# Altium PCB Copy of Demo_PCB.PcbDoc
Units mm, origin at the board's own origin, x right, y up, seen from the top; angles counter-clockwise.
Board outline 50 x 35 mm, 4 copper layers (Top Layer, Internal1, Internal2, Bottom Layer), stack 1.615 mm thick; 66 components, 59 nets, 275 pads, 0 vias.
Unrouted connection lines stored in the file: 185.
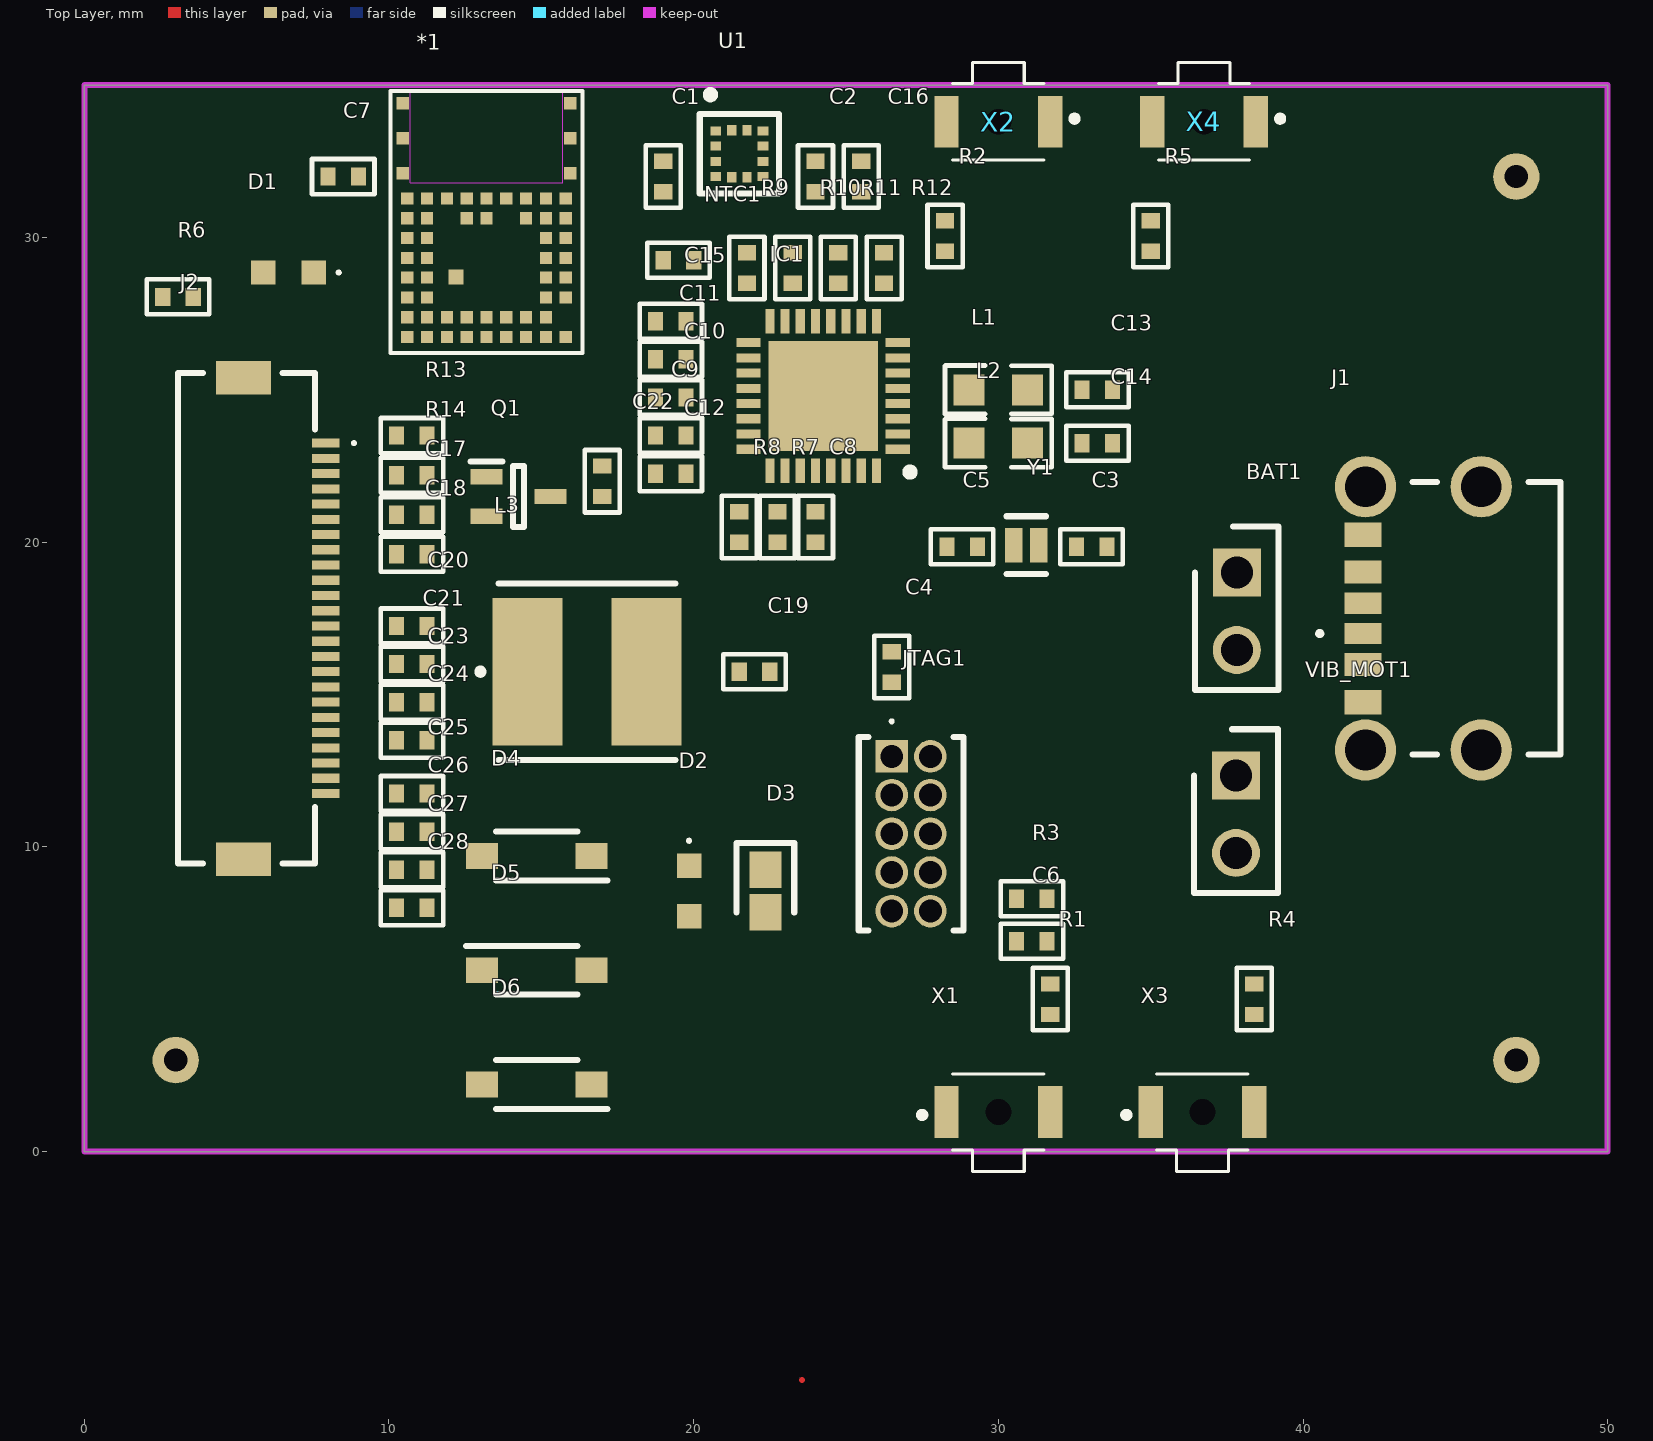
[diagram p0: Top Layer view]
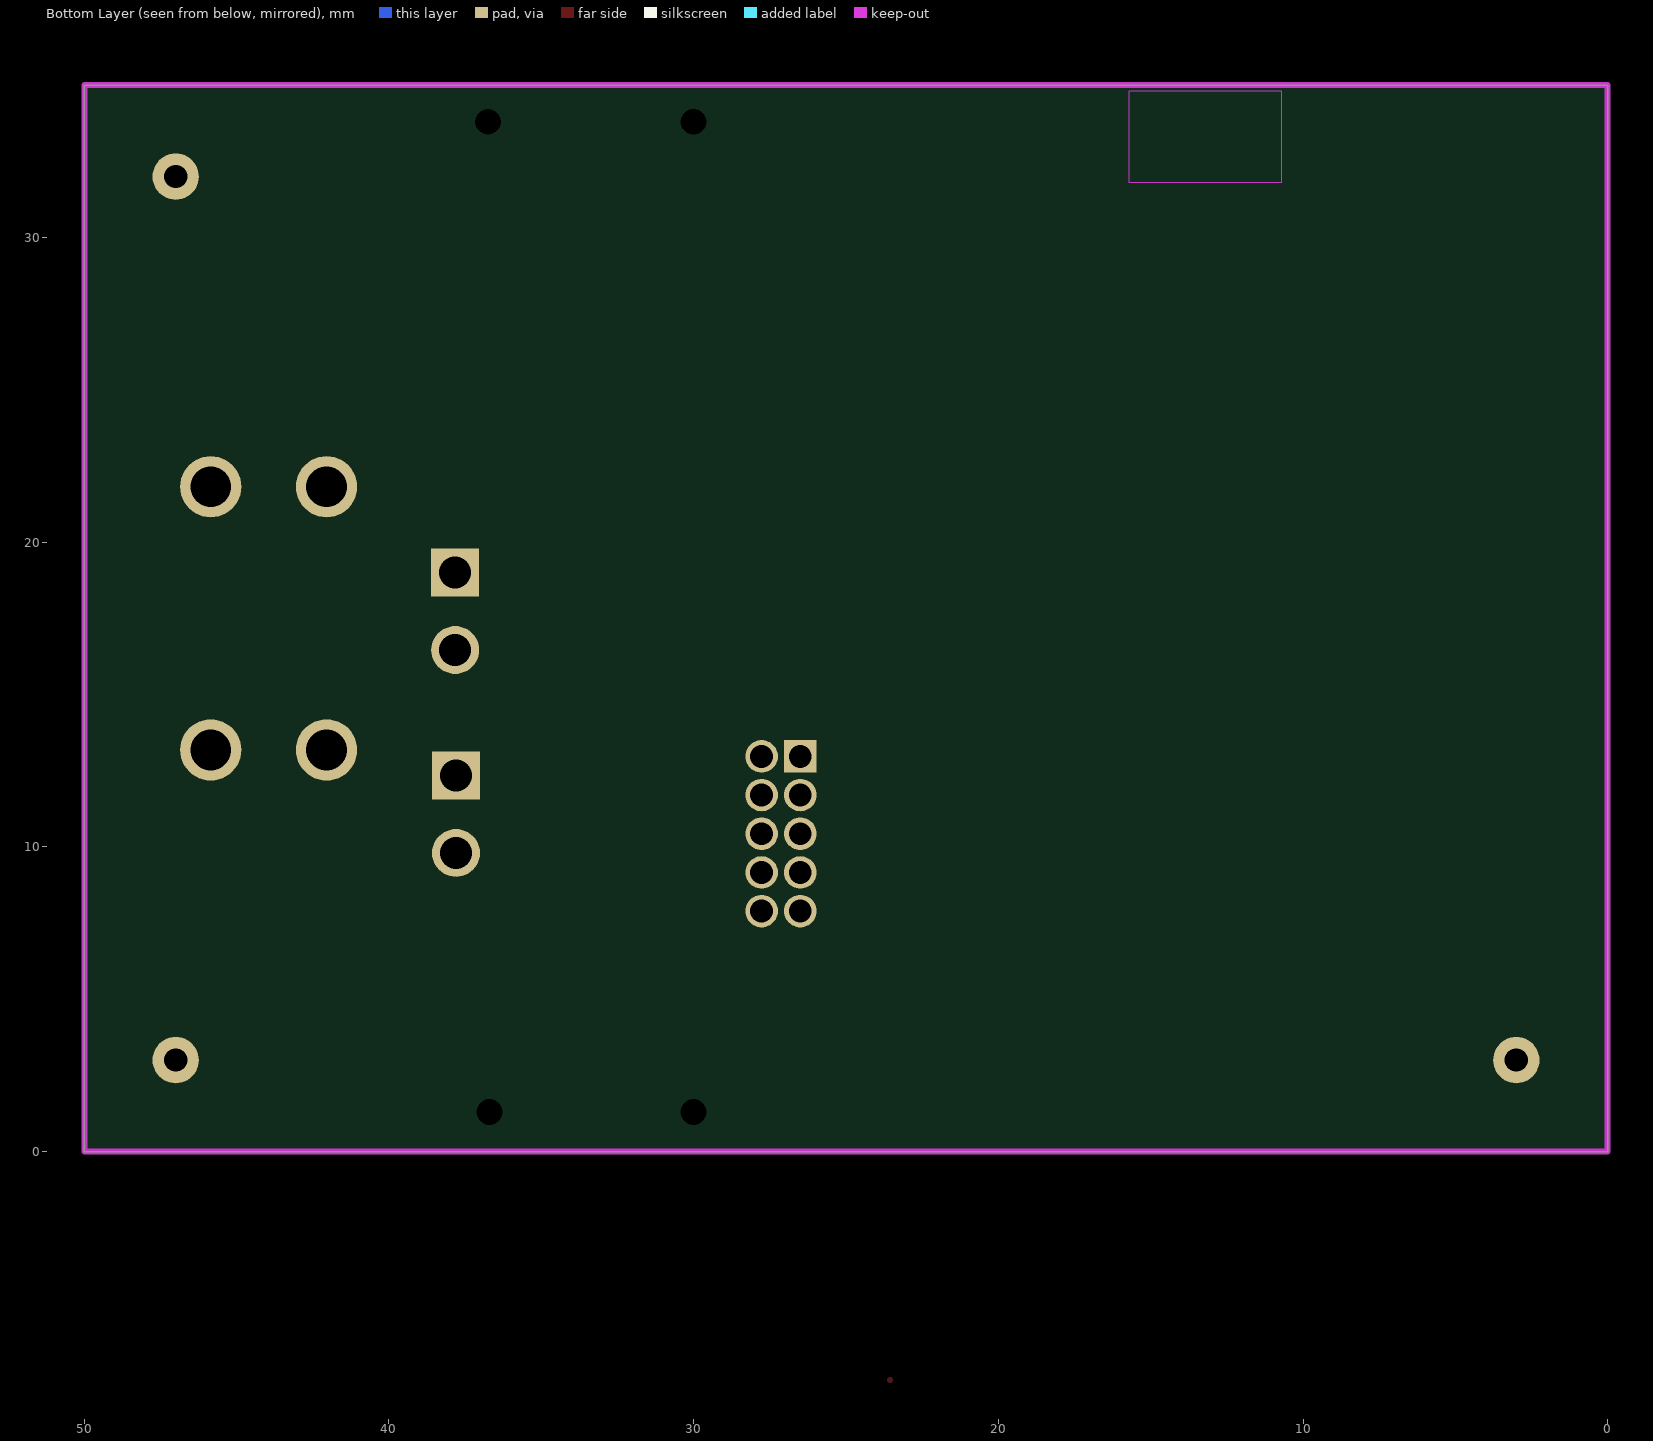
[diagram p1: Bottom Layer view, seen from below]

## Layer stack, top to bottom
Top Solder: solder mask 0.0102, Solder Resist, Dk 3.5
Top Layer: signal copper 0.0175
Prepeg_Top1: prepreg 0.2, Dk 4.5
Prepeg_Top2: prepreg 0.2, Dk 4.5
Internal1: signal copper 0.035
Core Dielectric: core 0.71, FR4, Dk 4.8
Internal2: signal copper 0.035
Prepeg_Bottom1: prepreg 0.2, Dk 4.5
Prepeg_Bottom2: prepreg 0.2, Dk 4.5
Bottom Layer: signal copper 0.0175
Bottom Solder: solder mask 0.0102, Solder Resist, Dk 3.5

## Board outline
0,35 50,35 50,0 0,0

## Design rules (kind name [scope] priority, off if disabled: settings)
BoardOutlineClearance [All] p1: gap=0.3 ignorepadtopadclearanceinfootprint=FALSE
Clearance Default [All] p1: gap=0.2 ignorepadtopadclearanceinfootprint=FALSE
Clearance [All] p2: gap=0.12 ignorepadtopadclearanceinfootprint=FALSE except(0: Arc-Hole Track-Hole SMDPad-Hole THPad-Hole Via-Hole Fill-Hole Poly-Hole Region-Hole Text-Hole; 0.25: Track-Via Track-Fill Track-Poly Track-Region Track-Text)
HoleSize [All] p1: absolutevalues=TRUE maxlimit=6 minlimit=0.3 maxpercent=80.000 minpercent=20.000
HoleToHoleClearance [All] p1: gap=0.52 allowstackedmicrovias=TRUE
MinimumAnnularRing [All] p1: minimumring=0.15
MinimumSolderMaskSliver [All] p1: minsoldermaskwidth=0.1
PlaneClearance [All] p1: clearance=0.25
PlaneConnect [All] p1: planeconnectstyle=Relief reliefexpansion=0.2 reliefentries=4 reliefconductorwidth=0.25 reliefairgap=0.2
PolygonConnect PowerCircuits [InNet('No Net')] p1: connectstyle=Relief reliefconductorwidth=0.4 reliefentries=4 polygonreliefangle="90 Angle" airgapwidth=0.254
PolygonConnect [All] p2: thpad.connectstyle=Relief thpad.reliefconductorwidth=0.2 thpad.reliefentries=4 thpad.polygonreliefangle="90 Angle" thpad.airgapwidth=0.2 smdpad.connectstyle=Relief smdpad.reliefconductorwidth=0.2 smdpad.reliefentries=4 smdpad.polygonreliefangle="90 Angle" smdpad.airgapwidth=0.2 via.connectstyle=Direct via.reliefconductorwidth=0.2 via.reliefentries=4 via.polygonreliefangle="45 Angle" via.airgapwidth=0.2
RoutingVias [All] p1: holewidth=0.35 width=0.75 viastyle="Through Hole" minholewidth=0.3 minwidth=0.7 maxholewidth=0.5 maxwidth=0.9
SilkToSilkClearance [All] p1: silktosilkclearance=0.12
SilkToSolderMaskClearance [IsPad] p1: minsilkscreentomaskgap=0.06 clearancetoexposedcopper=TRUE
SolderMaskExpansion [All] p1: expansion=0.05 istentingtop=FALSE
UnRoutedNet [All] p1: checkbadconnections=TRUE
Width [All] p1: maxlimit=1.5 minlimit=0.12 preferedwidth=0.2 midlayer1_prefwidth=0.15 midlayer2_prefwidth=0.15 minimp=50.000000 maximp=50.000000 favimp=50.000000
22 further rules are at their usual default settings.

## Classes and differential pairs
component class zasilanie: BAT1 C8 C9 C10 C11 C12 C13 C14 C15 C16 D2 D3 IC1 J1 L1 L2 NTC1 R7 R8 R9 R10 R11 R12 VIB_MOT1
component class BL653: *1 C3 C4 C5 C6 C7 D1 JTAG1 R1 R2 R3 R4 R5 R6 X1 X2 X3 X4 Y1
component class accelerometer: C1 C2 U1
component class 1.54inch_e-Paper: C17 C18 C19 C20 C21 C22 C23 C24 C25 C26 C27 C28 D4 D5 D6 J2 L3 L? Q1 R13 R14

## Components (designator, comment, footprint, x,y, rotation, side; value= is the part's Value field where it differs from the comment)
*1 "BL653u" ? 13.2,29.3 r90 top
BAT1 "Battery" RHDR20W60P0X254_1X20_5130X250X888P 37.7,19 r270 top
C1 "100n" 0402_CAP_REFLOW 19,32 r270 top
C2 "100n" 0402_CAP_REFLOW 24,32 r270 top
C3 "18p" 0402_CAP_REFLOW 33.063,19.85 r180 top
C4 "100nF" 0402_CAP_REFLOW 26.5,15.9 r90 top
C5 "18p" 0402_CAP_REFLOW 28.813,19.85 r0 top
C6 "100uF" 0402_CAP_REFLOW 31.1,6.9 r0 top
C7 "100nF" 0402_CAP_REFLOW 8.5,32 r180 top
C8 "10u" 0402_CAP_REFLOW 24,20.5 r90 top
C9 "10u" 0402_CAP_REFLOW 19.25,23.5 r180 top
C10 "10u" 0402_CAP_REFLOW 19.25,24.75 r180 top
C11 "10u" 0402_CAP_REFLOW 19.25,26 r180 top
C12 "1u" 0402_CAP_REFLOW 19.25,22.25 r180 top
C13 "10u" 0402_CAP_REFLOW 33.25,25 r0 top
C14 "10u" 0402_CAP_REFLOW 33.25,23.25 r0 top
C15 "2.2u" 0402_CAP_REFLOW 19.25,27.25 r180 top
C16 "100n" 0402_CAP_REFLOW 25.5,32 r270 top
C17 "54nF" 0402_CAP_REFLOW 10.75,20.9 r0 top
C18 "54nF" 0402_CAP_REFLOW 10.75,19.6 r0 top
C19 "250nF" 0402_CAP_REFLOW 22,15.75 r0 top
C20 "100nF" 0402_CAP_REFLOW 10.75,17.25 r0 top
C21 "54nF" 0402_CAP_REFLOW 10.75,16 r0 top
C22 "250nF" 0402_CAP_REFLOW 17,22 r90 top
C23 "54nF" 0402_CAP_REFLOW 10.75,14.75 r180 top
C24 "54nF" 0402_CAP_REFLOW 10.75,13.5 r0 top
C25 "54nF" 0402_CAP_REFLOW 10.75,11.75 r0 top
C26 "54nF" 0402_CAP_REFLOW 10.75,10.5 r0 top
C27 "54nF" 0402_CAP_REFLOW 10.75,9.25 r0 top
C28 "54nF" 0402_CAP_REFLOW 10.75,8 r0 top
D1 "=Value" LED_G 6.7,28.85 r180 top
D2 "=Value" LED_G 19.85,8.55 r270 top
D3 "=Value" LED_B 22.35,8.55 r270 top
D4 "Diode MBR0530" SOD3716X135N 14.85,9.7 r180 top
D5 "Diode MBR0530" SOD3716X135N 14.85,5.95 r0 top
D6 "Diode MBR0530" SOD3716X135N 14.85,2.2 r180 top
IC1 "NPM1300-QEAA-R" nPM1300-QFN50P500X500X90-33N 24.25,24.8 r180 top
J1 "USB-C" USB-C 45,17.5 r90 top
J2 "F34G-1A7Q1-E8C24" F34G1A7Q1E8C24 5.5,17.5 r270 top
JTAG1 "20021111-00010T1LF" 2002111100010T1LF 26.5,12.97 r270 top
L1 "2.2u" 0603_IND_2.2u_30%_DCR<400m? 30,25 r0 top
L2 "2.2u" 0603_IND_2.2u_30%_DCR<400m? 30,23.25 r0 top
L3 "68uH" SRR5828A2R6Y 16.5,15.75 r90 top
NTC1 "Header 2" 0402_RES_REFLOW 19.5,29.25 r0 top
Q1 "Si1308EDL-T1-GE3" SOT65P210X110-3N 14.25,21.5 r0 top
R1 "10K" 0402_RES_REFLOW 31.7,5 r90 top
R2 "10K" 0402_RES_REFLOW 28.25,30.05 r270 top
R3 "47K" 0402_RES_REFLOW 31.1,8.3 r180 top
R4 "10K" 0402_RES_REFLOW 38.4,5 r90 top
R5 "10K" 0402_RES_REFLOW 35,30.05 r270 top
R6 "1.69k" 0402_RES_REFLOW 3.075,28.05 r0 top
R7 "1.69k" 0402_RES_REFLOW 22.75,20.5 r90 top
R8 "1.69k" 0402_RES_REFLOW 21.5,20.5 r90 top
R9 "300k" 0402_RES_REFLOW 21.75,29 r270 top
R10 "300k" 0402_RES_REFLOW 23.25,29 r270 top
R11 "10K" 0402_RES_REFLOW 24.75,29 r90 top
R12 "10K" 0402_RES_REFLOW 26.25,29 r90 top
R13 "10K" 0402_RES_REFLOW 10.75,23.5 r180 top
R14 "3" 0402_RES_REFLOW 10.75,22.2 r0 top
U1 "BMA456" FP-BMA456-MFG 21.5,32.75 r270 top
VIB_MOT1 "vibration_motor_ODS-13807" RHDR20W60P0X254_1X20_5130X250X888P 37.673,12.34 r270 top
X1 "B3U-3000PM-B" B3U3000PMB 30,1.3 r180 top
X2 "B3U-3000PM-B" B3U3000PMB 30,33.8 r0 top
X3 "B3U-3000PM-B" B3U3000PMB 36.7,1.3 r180 top
X4 "B3U-3000PM-B" B3U3000PMB 36.75,33.8 r0 top
Y1 "ECS-.327-12.5-1210-TR" FP-ECX-1210-MFG 30.913,19.9 r0 top

## Footprints (in the part's own frame and the unit in brackets; to place one, negate y for a bottom-side part, rotate by r counter-clockwise, add the part's x,y. Pads: shape width x height; smd on the part's side, far side on the other; paste and mask are expansions set on the pad)
0402_CAP_REFLOW [mm]
  rect 0.5x0.6 smd paste-0.03 mask+0.1: 1(0.5,0) 2(-0.5,0)
  silkscreen extent -1.02,-0.57 1.02,0.57, body extent -0.5,-0.25 0.5,0.25, height 0.5
0402_RES_REFLOW [mm]
  rect 0.5x0.6 smd paste-0.03 mask+0.1: 1(0.5,0) 2(-0.5,0)
  silkscreen extent -1.02,-0.57 1.02,0.57, body extent -0.5,-0.25 0.5,0.25, height 0.3
0603_IND_2.2u_30%_DCR<400m? [mil]
  rect 40x40 smd: 1(-37.89,0) 2(37.89,0)
  silkscreen extent -69,-31 69,31, body extent -31,-16 31,16, height 39
2002111100010T1LF [mm]
  rect 1.07x1.07 hole 0.75: 1(0,0)
  round 1.07 hole 0.75: 2(0,1.27) 3(1.27,0) 4(1.27,1.27) 5(2.54,0) 6(2.54,1.27) 7(3.81,0) 8(3.81,1.27) 9(5.08,0) 10(5.08,1.27)
  silkscreen extent -1.2,-1.08 5.71,2.35
B3U3000PMB [mm]
  rect 0.8x1.7 smd: 1(1.7,0) 2(-1.7,0)
  round 0.425 hole 0.85 unplated: 3(0,0)
  silkscreen extent -1.5,-1.25 2.6,1.95
F34G1A7Q1E8C24 [mm]
  rect 0.3x0.9 smd: 1(-5.75,2.425) 2(-5.25,2.425) 3(-4.75,2.425) 4(-4.25,2.425) 5(-3.75,2.425) 6(-3.25,2.425) 7(-2.75,2.425) 8(-2.25,2.425) 9(-1.75,2.425) 10(-1.25,2.425) 11(-0.75,2.425) 12(-0.25,2.425) 13(0.25,2.425) 14(0.75,2.425) 15(1.25,2.425) 16(1.75,2.425) 17(2.25,2.425) 18(2.75,2.425) 19(3.25,2.425) 20(3.75,2.425) 21(4.25,2.425) 22(4.75,2.425) 23(5.25,2.425) 24(5.75,2.425)
  rect 1.1x1.8 smd: MP1(-7.9,-0.275) MP2(7.9,-0.275)
  silkscreen extent -8.05,-2.42 8.05,3.4
FP-BMA456-MFG [mm]
  rect 0.3x0.35 smd paste+0 mask+0: 1(-0.75,-0.775) 2(-0.25,-0.775) 3(0.25,-0.775) 4(0.75,-0.775) 7(0.75,0.775) 8(0.25,0.775) 9(-0.25,0.775) 10(-0.75,0.775)
  rect 0.35x0.3 smd paste+0 mask+0: 5(0.775,-0.25) 6(0.775,0.25) 11(-0.775,0.25) 12(-0.775,-0.25)
  silkscreen extent -2.06,-1.3 1.3,1.3, body extent -1,-1 1,1, height 0.7
FP-ECX-1210-MFG [mm]
  rect 0.575x1.14 smd paste+0 mask+0: 1(-0.413,0) 2(0.413,0)
  silkscreen extent -0.65,-0.95 0.65,0.95, body extent -0.6,-0.5 0.6,0.5, height 0.5
LED_B [mm] "SML-LX0603USBW-TR"
  rect 1.2x1.05 smd: 1(-0.7,0) 2(0.7,0)
  silkscreen extent -1.58,-0.95 0.7,0.95
LED_G [mm] "SML-LXFM0603SUGCTR"
  rect 0.8x0.8 smd: 1(-0.825,0) 2(0.825,0)
  silkscreen extent -1.7,-0.05 -1.6,0.05, body extent -0.8,-0.4 0.8,0.4, height 1.2
nPM1300-QFN50P500X500X90-33N [mm]
  rect 0.8x0.3 smd: 1(-2.45,1.75) 2(-2.45,1.25) 3(-2.45,0.75) 4(-2.45,0.25) 5(-2.45,-0.25) 6(-2.45,-0.75) 7(-2.45,-1.25) 8(-2.45,-1.75) 17(2.45,-1.75) 18(2.45,-1.25) 19(2.45,-0.75) 20(2.45,-0.25) 21(2.45,0.25) 22(2.45,0.75) 23(2.45,1.25) 24(2.45,1.75)
  rect 0.3x0.8 smd: 9(-1.75,-2.45) 10(-1.25,-2.45) 11(-0.75,-2.45) 12(-0.25,-2.45) 13(0.25,-2.45) 14(0.75,-2.45) 15(1.25,-2.45) 16(1.75,-2.45) 25(1.75,2.45) 26(1.25,2.45) 27(0.75,2.45) 28(0.25,2.45) 29(-0.25,2.45) 30(-0.75,2.45) 31(-1.25,2.45) 32(-1.75,2.45)
  rect 3.6x3.6 smd: 33(0,0)
  silkscreen extent -2.98,2.38 -2.73,2.62, body extent -2.55,-2.55 2.55,2.55, height 0.9
RHDR20W60P0X254_1X20_5130X250X888P [mm]
  rect 1.575x1.575 hole 1.05: 1(0,0.127)
  round 1.575 hole 1.05: 2(2.54,0.127)
  silkscreen extent -1.52,-1.25 3.85,1.5
SOD3716X135N [mm]
  rect 1.05x0.85 smd: 1(-1.8,0) 2(1.8,0)
  silkscreen extent -2.32,-0.8 1.34,0.8
SOT65P210X110-3N [mm]
  rect 1.05x0.5 smd: 1(-1.05,0.65) 2(-1.05,-0.65) 3(1.05,0)
  silkscreen extent -1.58,-1 0.18,1.15
SRR5828A2R6Y [mm]
  rect 4.85x2.3 smd: 1(0,1.95) 2(0,-1.95)
  silkscreen extent -2.9,-2.9 2.9,3.6
USB-C [mm]
  rect 0.7x1.2 smd: A5(-0.5,3.03) B5(0.5,3.03)
  rect 0.76x1.2 smd: A9(1.52,3.03) B9(-1.52,3.03)
  rect 0.8x1.2 smd: A12(2.75,3.03) B12(-2.75,3.03)
  round 2.01 hole 1.34: MH1(-4.32,-0.85) MH2(4.32,-0.85) MH3(-4.32,2.95) MH4(4.32,2.95)
  silkscreen extent -4.47,-3.45 4.47,4.5, body extent -4.47,-3.44 4.47,3.46, height 0.25
? [mm]
  rect 0.4x0.4 smd mask+0.051: 1(1.982,2.6) 2(1.982,1.95) 3(1.982,1.3) 4(1.982,0.65) 5(1.982,0) 6(1.982,-0.65) 7(1.982,-1.3) 8(1.982,-1.95) 9(1.982,-2.6) 10(1.332,-2.6) 11(0.683,-2.6) 12(0.033,-2.6) 13(-0.617,-2.6) 14(-1.267,-2.6) 16(-2.567,-2.6) 17(-2.567,-1.95) 18(-2.567,-1.3) 19(-2.567,-0.65) 20(-2.567,0) 21(-2.567,0.65) 22(-2.567,1.3) 23(-2.567,1.95) 24(-2.567,2.6) 25(-1.917,2.6) 26(-1.267,2.6) 27(-0.617,2.6) 28(0.033,2.6) 29(0.682,2.6) 30(1.333,2.6) 31(1.332,1.95) 33(1.332,0.65) 34(1.332,0) 36(1.332,-1.3) 37(1.333,-1.95) 38(0.682,-1.95) 39(0.033,-1.95) 40(-0.617,-1.95) 41(-1.267,-1.95) 42(-1.917,-1.95) 43(-1.917,-1.3) 44(-1.917,-0.65) 45(-1.917,0) 46(-1.917,0.65) 47(-1.917,1.3) 48(-1.917,1.95) 49(-1.267,1.95) 50(-0.617,1.95) 51(0.033,1.95) 52(0.683,1.95) G2(5.107,-2.75) G3(3.957,-2.75) G4(2.807,-2.75) G5(2.808,2.75) G6(3.957,2.75) G7(5.107,2.75)
  rect 0.5x0.5 smd mask+0.051: G1(-0.592,1)
  Keep-Out Layer lines w0.025: 2.5,2.5 5.508,2.5 5.508,-2.5 2.5,-2.5 2.5,2.5
  silkscreen extent -3.09,-3.15 5.51,3.15, body extent -2.77,-2.95 5.31,2.95, height 0.01

## Part data
BAT1: "BATTERY, Li-ion, Li-polymer, or LiFePO4", LatestRevisionDate=17-Jul-2002, LatestRevisionNote="Re-released for DXP Platform.", Publisher="Altium Limited"
C1 C2: library part CAP_100n, "Ceramic capacitor"
C3 C5: library part CAP_18p, "Ceramic capacitor"
C4 C7 C20: library part "Capacitor 100nF"
C6: library part "Capacitor 100uF"
C8 C9 C10 C11 C13 C14: library part Cap_0402_10u, "Ceramic capacitor"
C12: library part Cap_0402_1u, "Ceramic capacitor"
C15: library part Cap_0402_2.2u, "Ceramic capacitor"
C16: library part Cap_0402_100n, "Ceramic capacitor"
C17 C18 C21 C23 C24 C25 C26 C27 C28: library part "Capacitor 54nF"
C19 C22: library part "Capacitor 250nF"
D1 D2: library part LED_G
D3: library part LED_B
IC1: "Integrated Circuit", Manufacturer_Name="Nordic Semiconductor", Mouser Part Number=949-NPM1300-QEAA-R, Datasheet Link=https://infocenter.nordicsemi.com/index.jsp?topic=%2Fstruct_pmic%2Fstruct%2Fnpm1300.html, Height=0.9mm, Manufacturer_Part_Number=NPM1300-QEAA-R, Mouser Price/Stock=https://www.mouser.co.uk/ProductDetail/Nordic-Semiconductor/nPM1300-QEAA-R?qs=3pZoU%2F6IRTiFavqFmjPoaw%3D%3D
J1: "Connector", Manufacturer_Name=Molex, Manufacturer_Part_Number=217175-0001, Mouser Part Number=538-217175-0001, Datasheet Link=https://www.molex.com/pdm_docs/sd/2171750001_sd.pdf, Height=3.46mm, Mouser Price/Stock=https://www.mouser.co.uk/ProductDetail/Molex/217175-0001?qs=DRkmTr78QARWJMiqNnldSg%3D%3D
J2: library part "FFC & FPC Connectors"
JTAG1: "Minitek127<sup></sup>,  Board to Board connector, Unshrouded Vertical Header, Through Hole, Double Row, 10 Positions, 1.27mm (0.050in) pitch.", Manufacturer_Name="Amphenol Communications Solutions", Datasheet Link=https://cdn.amphenol-cs.com/media/wysiwyg/files/drawing/20021111.pdf, Geometry.Height=5.75mm, Manufacturer_Part_Number=20021111-00010T1LF
L1 L2: library part L_0603_2.2u_30%_DCR<400mΩ, "Inductor"
L3: library part InductorA_A, "SRR5828A-680M"
NTC1: library part NTC_1%, "NTC, 10 / 47 / 100 k", LatestRevisionDate=17-Jul-2002, LatestRevisionNote="Re-released for DXP Platform.", Publisher="Altium Limited"
Q1: "MOSFET N-Ch 30V 1.5A TrenchFET SC70 Vishay Si1308EDL-T1-GE3 N-channel MOSFET Transistor, 1.5 A, 30 V, 3-Pin SC-70", Manufacturer_Name=Vishay, Mouser Part Number=78-SI1308EDL-T1-GE3, Datasheet Link=https://componentsearchengine.com/Datasheets/1/SI1308EDL-T1-GE3.pdf, Geometry.Height=1.1mm, Manufacturer_Part_Number=Si1308EDL-T1-GE3, Mouser Price/Stock=https://www.mouser.co.uk/ProductDetail/Vishay-Semiconductors/SI1308EDL-T1-GE3?qs=bX1%252BNvsK%2FBramh9tgpOaEw%3D%3D
R1 R2 R4 R5 R11 R12 R13: library part "Resistor R10K"
R3: library part "Resistor R47K"
R6 R7: library part RES_0402_1.69k_1, "Resistor, green LED"
R8: library part RES_0402_1.69k, "Resistor, blue LED"
R9 R10: library part RES_0402_300k_0.05W_1%, "Resistor"
R14: library part "Resistor R3"
U1: library part CMP-191065-000002-1, "ACCEL 2-16G I2C/SPI 12LGA", Ambient Temperature Range High=+85°C, Ambient Temperature Range Low=-40°C, Frequency=1.6kHz, Manufacturer="Bosch Sensortec", Max Supply Voltage=3.6V, Min Supply Voltage=1.2V, Operating Supply Current=150uA, Package=0, Temperature="-40°C to +85°C", Accel Axis="X+Y and Z", Accel Range=2/4/8/16g, Accel Sensitivity=2048-16384LSB/g, Automotive=No, Category=IC, ComponentLink2Description=Datasheet, ComponentLink2URL=https://ae-bst.resource.bosch.com/media/_tech/media/datasheets/BST-BMA456-DS000.pdf, Device Class L1=Sensors, Device Class L2="Motion Sensors", Device Class L3=Accelerometers, Digikey Description="ACCEL 2-16G I2C/SPI 12LGA", Height=0.7mm, Lead Free=Yes, Manufacturer Part Number=BMA456, Mouser Description="BMA456 Series 3.6 V 1.6 kHz Digital Triaxial Acceleration Sensor - LGA-12", Octopart=https://octopart.com/bma456-bosch+sensortec-99488369, RoHS=TRUE, Sensor Output=I2C,SPI, Temperature Range High=+85°C, Temperature Range Low=-40°C
X1 X2 X3 X4: "Tactile Switches Side Actuate w/Boss w/out Ground Term", Manufacturer_Name="Omron Electronics", Mouser Part Number=653-B3U-3000PM-B, Geometry.Height=1.35mm, Manufacturer_Part_Number=B3U-3000PM-B, Mouser Price/Stock=https://www.mouser.co.uk/ProductDetail/Omron-Electronics/B3U-3000PM-B?qs=hnUcNC2tU0qDz9eschRYDA%3D%3D
Y1: library part CMP-40224-000006-1, "CRYSTAL 32.7680KHZ 12.5PF SMD", Frequency=32.768kHz, Load Capacitance=12.5pF, Manufacturer="ECS International", Package=ECX-1210, Temperature="-40°C to +85°C", Temperature Range High=+85°C, Temperature Range Low=-40°C, Tolerance=20ppm, Automotive=No, Category=Crys, ComponentLink2Description=Datasheet, ComponentLink2URL=https://ecsxtal.com/store/pdf/ECX-1210.pdf, Device Class L1="Passive Components", Device Class L2="Crystals / Oscillators", Device Class L3=Crystals, Digikey Description="CRYSTAL 32.7680KHZ 12.5PF SMD", Esr=90kΩ, Height=0.5mm, Lead Free=Yes, Manufacturer Part Number=ECS-.327-12.5-1210-TR, Octopart=https://octopart.com/ecs-.327-12.5-1210-tr-ecs+international-81221340, RoHS=TRUE, Series=ECX-1210

## Free pads (board coordinates)
  round 1.524 hole 0.762: 1(47,32) 2(3,3) 3(47,3)

## Nets (pads, with @x,y where several pads share a name; then routed paths per layer and width w, separated by ;. In a path a pad name is that pad's centre, name@x,y a point inside that pad or via, vN(x,y) a via of type N, cw(c..) or ccw(c..) an arc to the next point about the centre after c; other vN are vias at no path point)
B1: *1.37 R1.2 X1.2
B2: *1.44 R2.2 X2.2
B3: *1.46 R4.2 X3.2
B4: *1.49 R5.2 X4.2
CC1: IC1.23 J1.A5
CC2: IC1.24 J1.B5
GND: *1.1 *1.3 *1.5 *1.7 *1.9 *1.11 *1.16 *1.18 *1.20 *1.24 *1.48 *1.G1 *1.G2 *1.G3 *1.G4 *1.G5 *1.G6 *1.G7 BAT1.2 C1.1 C2.2 C3.2 C4.1 C5.2 C6.1 C7.1 C8.2 C9.1 C10.1 C11.1 C12.1 C13.1 C14.1 C15.1 C16.1 C17.1 C18.1 C19.1 C20.1 C21.1 C23.2 C24.1 C25.1 C26.1 C27.1 C28.1 D6.2 IC1.2 IC1.6 IC1.33 J1.A12 J1.B12 J1.MH1 J1.MH2 J1.MH3 J1.MH4 J2.8 J2.17 J2.MP1 J2.MP2 JTAG1.3 JTAG1.9 NTC1.2 R1.1 R2.1 R4.1 R5.1 R6.2 R9.2 R10.2 R13.2 R14.1 U1.8 U1.9 VIB_MOT1.2
LED: *1.12 D1.1
Net*1_17: *1.17 U1.2
Net*1_27: *1.27 U1.6
Net*1_29: *1.29 U1.5
Net*1_34: *1.34 U1.10
Net*1_36: *1.36 J2.9
Net*1_38: *1.38 J2.10
Net*1_39: *1.39 J2.12
Net*1_40: *1.40 U1.12
Net*1_43: *1.43 U1.1
Net*1_45: *1.45 J2.14
Net*1_47: *1.47 J2.13
Net*1_50: *1.50 J2.11
NetBAT1_1: BAT1.1 C15.2 IC1.19
NetC17_2: C17.2 J2.4
NetC18_2: C18.2 J2.5
NetC21_2: C21.2 J2.18
NetC22_1: C22.1 D5.2 D6.1
NetC22_2: C22.2 D4.1 L3.1 Q1.3
NetC23_1: C23.1 J2.19
NetC24_2: C24.2 J2.20
NetC25_2: C25.2 D4.2 J2.21
NetC26_2: C26.2 J2.22
NetC27_2: C27.2 D5.1 J2.23
NetC28_2: C28.2 J2.24
NetD1_2: D1.2 R6.1
NetD2_2: D2.2 R7.2
NetD3_2: D3.2 R8.2
NetIC1_3: IC1.3 L2.1
NetIC1_5: IC1.5 L1.1
NetIC1_25: IC1.25 R8.1
NetIC1_26: IC1.26 R7.1
NetIC1_29: IC1.29 VIB_MOT1.1
NetJ2_2: J2.2 Q1.1 R13.1
NetJ2_3: J2.3 Q1.2 R14.2
nRESET: *1.6 C6.2 JTAG1.10 R3.1
NTC: IC1.18 NTC1.1
RX: *1.14 JTAG1.7
SCL: *1.4 IC1.14 R11.2
SDA: *1.23 IC1.13 R12.2
SWCLK: *1.31 JTAG1.4
SWDIO: *1.52 JTAG1.2
SWO: *1.51 JTAG1.6
TX: *1.42 JTAG1.5
VBUS: C12.2 IC1.21 J1.A9 J1.B9
Vcc: *1.21 *1.22 *1.30 C1.2 C2.1 C4.2 C7.2 C14.2 C16.2 C19.2 C20.2 IC1.12 IC1.32 J2.15 J2.16 JTAG1.1 L2.2 L3.2 R3.2 R11.1 R12.1 U1.3 U1.7 X1.1 X2.1 X3.1 X4.1
VOUT2: C8.1 C13.2 IC1.1 IC1.28 L1.2
VSET1: IC1.17 R9.1
VSET2: IC1.16 R10.1
VSYS: C9.2 C10.2 C11.2 D2.1 D3.1 IC1.4 IC1.20
XL1: *1.41 C3.1 Y1.2
XL2: *1.13 C5.1 Y1.1
pads on no net: *1.2 *1.8 *1.10 *1.19 *1.25 *1.26 *1.28 *1.33 IC1.7 IC1.8 IC1.9 IC1.10 IC1.11 IC1.15 IC1.22 IC1.27 IC1.30 IC1.31 J2.1 J2.6 J2.7 JTAG1.8 U1.4 U1.11 X1.3 X2.3 X3.3 X4.3
copper on no net: | length 0
  Top Layer w0.2: 23.55,-7.5 23.554,-7.496 23.56,-7.496

## Keep-outs
Keep-Out Layer:
  the board outline again, w0.2

## Silkscreen, mask and mechanical layers (free items; w line width, h text height)
wyswietlacz:
  lines w0.2: 6.35,33.5 6.35,1.5 43.97,1.5 43.97,33.5 6.45,33.5

## Text inside footprints (layer, text, board x,y; h text height)
*1: Top Component Outline "Keep out Area" at 11.168,33.237 h0.38